# Altium PCB PCB1.PcbDoc (part 1 of 2)
Units mil, origin at the board's own origin, x right, y up, seen from the top; angles counter-clockwise.
Board outline 2362.2 x 2362.2 mil, 2 copper layers (Top Layer, Bottom Layer); 153 components, 106 nets, 570 pads, 334 vias.
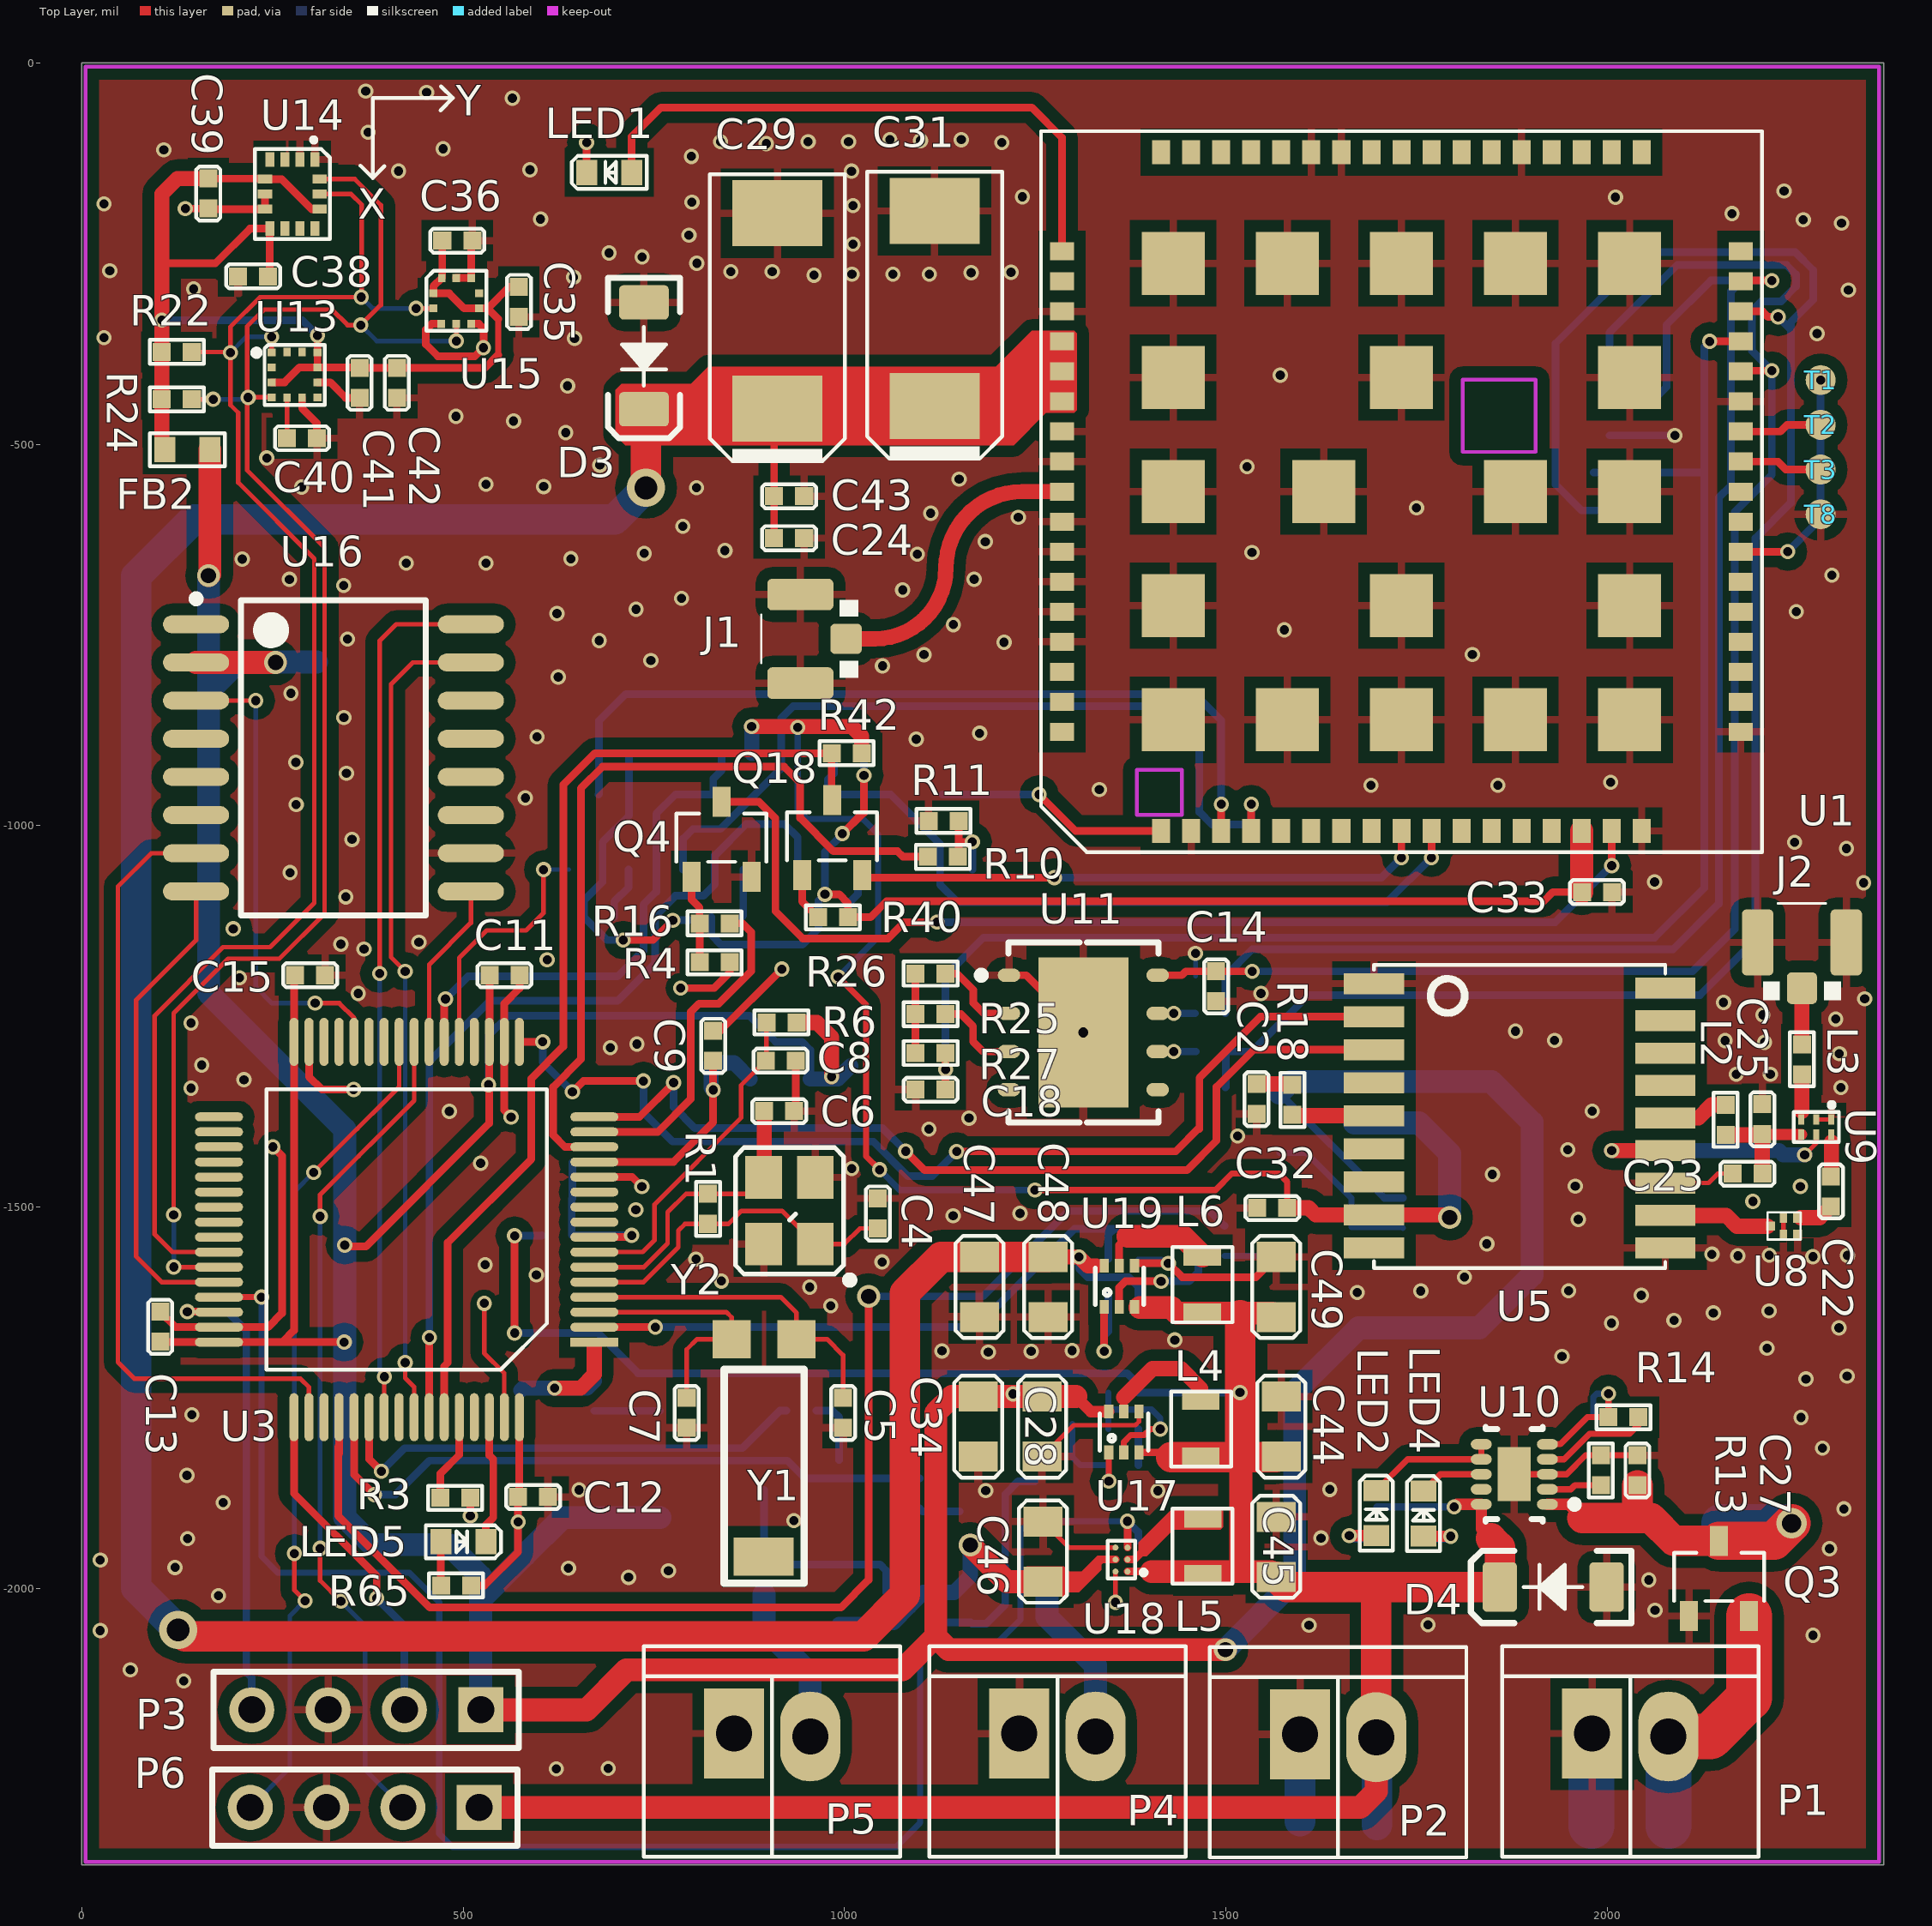
[diagram p0: Top Layer view]
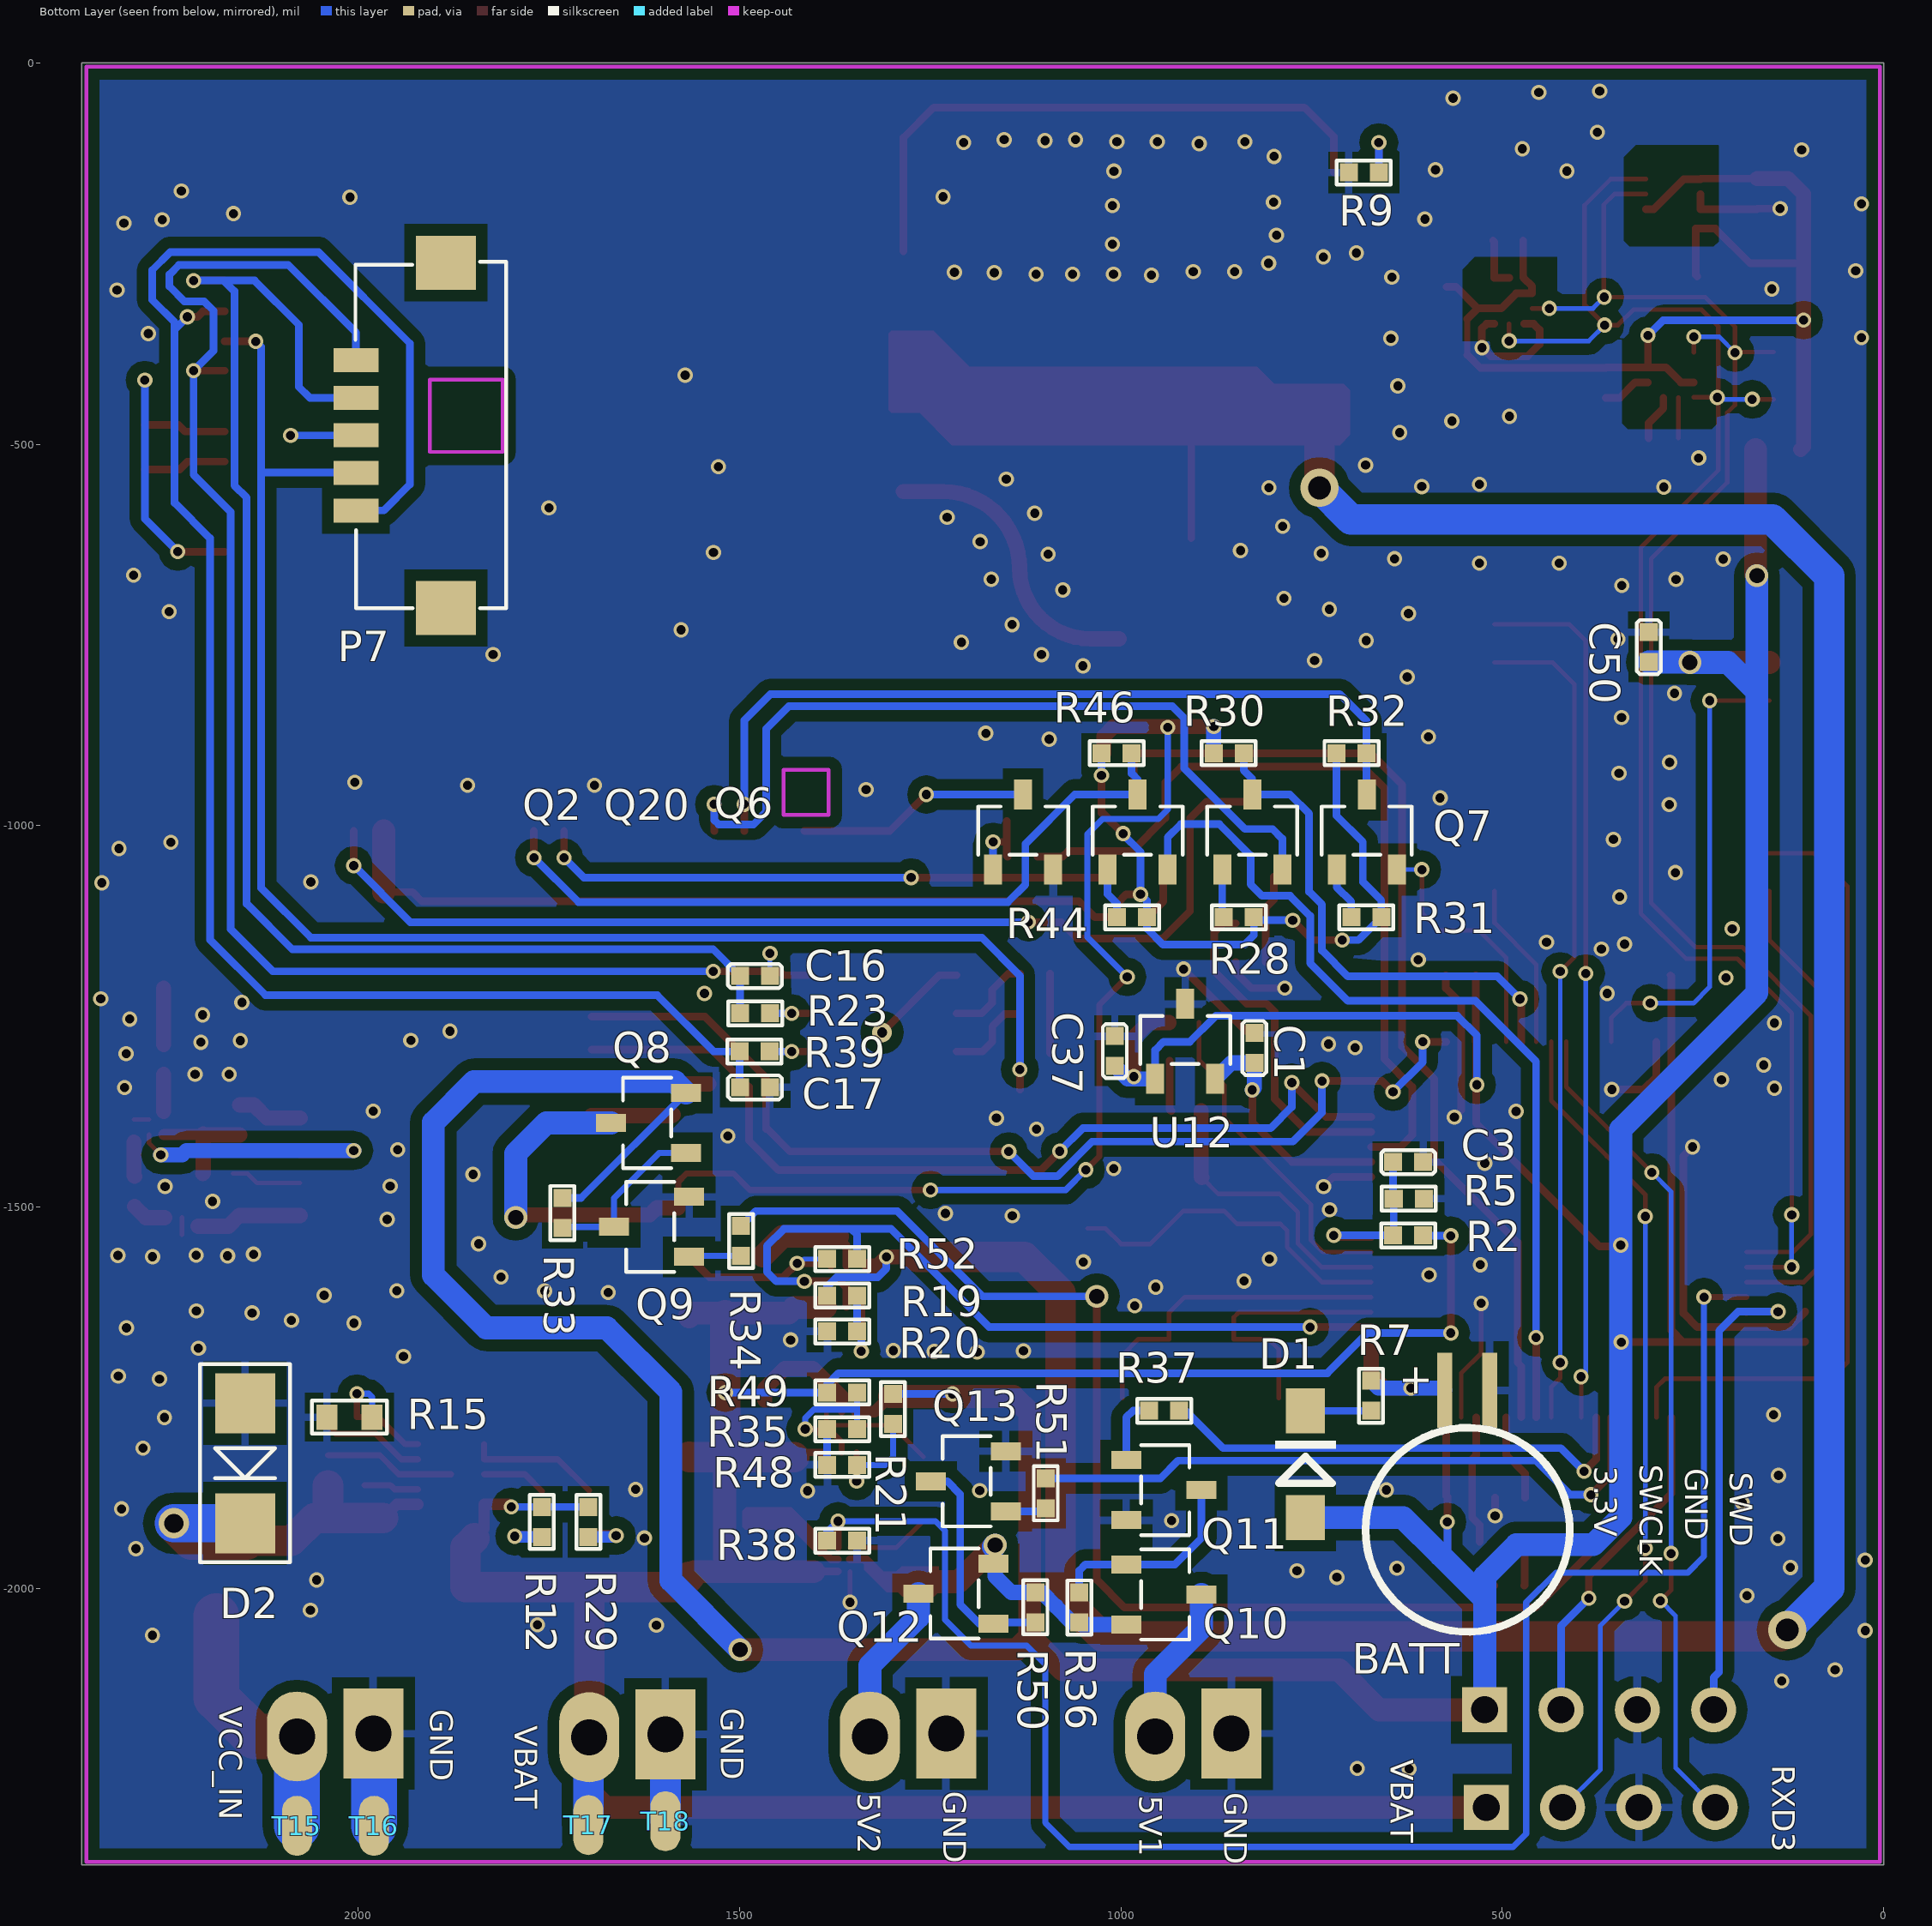
[diagram p1: Bottom Layer view, seen from below]

## Layer stack, top to bottom
Top Layer: signal copper 1.4
Dielectric: dielectric 12.6, FR-4, Dk 4.8
Bottom Layer: signal copper 1.4

## Board outline
0,-2362.2 0,0 2362.2,0 2362.2,-2362.2

## Design rules (kind name [scope] priority, off if disabled: settings)
Clearance [InPolygon  And InNet(AGND)] p1: gap=15
Clearance Clearance_1 [All] p2: gap=5
HoleToHoleClearance [All] p1: gap=5 allowstackedmicrovias=TRUE
MinimumSolderMaskSliver [All] p1: minsoldermaskwidth=1
PolygonConnect PolygonConnect_1 [InNet('AGND') And IsVia] p1: connectstyle=Direct reliefconductorwidth=10 reliefentries=4 polygonreliefangle="90 Angle"
PolygonConnect [All] p2: connectstyle=Relief reliefconductorwidth=10 reliefentries=4 polygonreliefangle="90 Angle"
RoutingVias [All] p1: holewidth=28 width=50 viastyle="Through Hole" minholewidth=28 minwidth=50 maxholewidth=28 maxwidth=50
SilkToSilkClearance [All] p1: silktosilkclearance=5
SilkscreenOverComponentPads [All] p1: minsilkscreentomaskgap=1
SolderMaskExpansion [All] p1: expansion=4
Width [All] p1: maxlimit=200 minlimit=5 preferedwidth=10
24 further rules are at their usual default settings.

## Classes and differential pairs
component class 4G: C2 C23 C32 L2 Q4 R4 R16 R18 U1 U5 U?
component class CPU: BATT C3 C4 C5 C6 C7 C8 C9 C11 C12 C13 C15 C50 D1 LED5 P3 P6 R1 R2 R3 R5 R6 R7 R65 U3 U16 U? Y1 Y2
component class GPS&&lte: C14 C16 C17 C18 C22 C24 C25 C26 C29 C30 C31 C33 C43 D3 J1 J2 L3 LED1 P7 Q2 Q6 Q7 Q18 Q19 Q20 Q21 R8 R9 R10 R11 R23 R25 R26 R27 R28 R30 R31 R32 R39 R40 R41 R42 R43 R44 R45 R46 R47 T1 T2 T3 T8 U8 U9 U11
component class power: C1 C27 C28 C34 C37 C44 C45 C46 C47 C48 C49 D2 D4 L4 L5 L6 LED2 LED4 P1 P2 P4 P5 Q3 Q8 Q9 Q10 Q11 Q12 Q13 R12 R13 R14 R15 R19 R20 R21 R29 R33 R34 R35 R36 R37 R38 R48 R49 R50 R51 R52 T15 T16 T17 T18 U10 U12 U17 U18 U19
component class sensors: C35 C36 C38 C39 C40 C41 C42 FB2 R22 R24 U13 U14 U15

## Components (designator, comment, footprint, x,y, rotation, side; value= is the part's Value field where it differs from the comment)
BATT "MS621FE" MS621FE 546,-1740 r90 bottom
C1 "0.1uF/25V" 0402c 825,-1311 r90 bottom
C2 "4.7uF/10V" 0402c 1540,-1378 r90 top
C3 "0.1uF/25v" 0402c 643,-1441 r180 bottom
C4 "22pF" 0402c 1043.62,-1488.58 r270 top
C5 "6pF" 0402c 998,-1750 r270 top
C6 "22pF" 0402c 934,-1374 r180 top
C7 "6pF" 0402c 793,-1750 r270 top
C8 "0.1uF/25V" 0402C 936,-1308 r180 top
C9 "0.1uF/25V" 0402C 827.76,-1268.82 r270 top
C11 "0.1uF/25V" 0402C 574,-1196 r180 top
C12 "0.1uF/25V" 0402C 611.42,-1879.96 r180 top
C13 "0.1uF/25V" 0402C 103,-1637 r270 top
C14 "0.1uF" 0402C 1487,-1230.25 r90 top
C15 "0.1uF/25V" 0402C 319,-1196 r180 top
C16 "10pF/NC" 0402C 1460,-1197 r0 bottom
C17 "10pF/NC" 0402C 1460,-1343 r0 bottom
C18 "10pF/NC" 0402C 1093.04,-1346 r0 top
C22 "36pF" 0402c 2293,-1499 r90 top
C23 "4.7uF" 0402c 2164,-1456 r0 top
C24 "10pF" 0402C 947,-623 r180 top
C25 "0.1uF" 0402C 2203,-1365 r270 top
C27 "1uF/25V" 0402C 2039.37,-1864.76 r90 top
C28 "22uF/10V" 0805C 1259,-1748.31 r270 top
C29 "1000uF" 7343 912,-453 r90 top
C31 "1000uF" 7343 1118,-450 r90 top
C32 "10uF/10V" 0402C 1541,-1501 r0 top
C33 "0.1uF" 0402C 2006,-1087 r180 top
C34 "22uF/10V" 0805C 1175,-1748.31 r270 top
C35 "0.1uF/25V" 0402C 573,-333 r90 top
C36 "0.1uF/25V" 0402C 512,-233 r180 top
C37 "0.1uF/25V" 0402c 1008,-1315 r90 bottom
C38 "0.1uF/25V" 0402C 205,-280 r0 top
C39 "0.1uF/25V" 0402C 166,-191 r90 top
C40 "22pF" 0402c 269,-492 r0 top
C41 "0.1uF/25V" 0402C 364.25,-439.19 r90 top
C42 "0.1uF/25V" 0402C 413.25,-439.19 r90 top
C43 "33pF" 0402C 947,-568 r180 top
C44 "22uF/10V" 0805C 1572.42,-1827.05 r90 top
C45 "22uF/10V" 0805C 1566,-1984.74 r90 top
C46 "22uF/10V" 0805C 1260,-1991 r90 top
C47 "22uF/10V" 0805C 1177,-1565.26 r270 top
C48 "22uF/10V" 0805C 1267,-1565.26 r270 top
C49 "22uF/10V" 0805C 1566,-1644 r90 top
C50 "0.1uF/25V" 0402C 307.93,-746.08 r270 bottom
D1 "1N4148" DIODE_SOP 758,-1907 r90 bottom
D2 "SMAJ12CA" SMA 2148,-1757 r270 bottom
D3 "DIODE_SCHOTTKY_0" LL-34(D1206) 737,-384 r270 top
D4 "DIODE_SCHOTTKY_0" LL-34(D1206) 1929,-1998 r180 top
FB2 "10R/1A" 0603R 168,-507 r180 top
J1 "IPEX" RF-UFL 942,-755 r90 top
J2 "IPEX" RF-UFL 2255,-1153 r0 top
L2 "27nH" 0402R 2155,-1366 r270 top
L3 "LQW15A" 0402R 2255,-1326 r90 top
L4 "SRP4020TA-1R0M" L2520 1466.99,-1753.05 r270 top
L5 "SRP4020TA-2R2M" L2520 1469.74,-1982 r90 top
L6 "SRP4020TA-1R0M" L2520 1469,-1564 r270 top
LED1 "LED" 0603LED 720.94,-143.75 r180 top
LED2 "LED" 0603LED 1697.2,-1930.51 r90 top
LED4 "LED" 0603LED 1759,-1931.4 r90 top
LED5 "LED" 0603LED 470.67,-1938.58 r0 top
P1 "Header 2" 2X2.54MMZ 1980,-2190 r0 top
P2 "Header 2" 2X2.54MMZ 1597,-2191 r0 top
P3 "Header 4" HDR1X4 523,-2159 r180 top
P4 "Header 2" 2X2.54MMZ 1229,-2190 r0 top
P5 "Header 2" 2X2.54MMZ 855,-2190 r0 top
P6 "Header 4" HDR1X4 521,-2287 r180 top
P7 "Header 5" 5×1.25mmSMT 2002.8,-586.77 r90 bottom
Q2 "MMBT3904" SOT23-3 1167.5,-1057.51 r270 bottom
Q3 "Si2369DS" sot23-3 2107,-2036 r270 top
Q4 "MMBT3904" SOT23-3 799.26,-1067 r270 top
Q6 "MMBT3904" SOT23-3 867.17,-1057.51 r270 bottom
Q7 "MMBT3904" SOT23-3 717,-1057.51 r270 bottom
Q8 "Si2369DS" sot23-3 1570,-1429 r180 bottom
Q9 "S8050" SOT23-3 1566,-1565.26 r180 bottom
Q10 "Si2369DS" sot23-3 992.87,-1968.46 r0 bottom
Q11 "S8050" SOT23-3 992.87,-1831.57 r0 bottom
Q12 "Si2369DS" sot23-3 1167,-2046 r180 bottom
Q13 "S8050" SOT23-3 1150.83,-1898.82 r180 bottom
Q18 "MMBT3904" SOT23-3 944.26,-1065 r270 top
Q20 "MMBT3904" SOT23-3 1017.33,-1057.51 r270 bottom
R1 "1MR" 0402R 821,-1522 r90 top
R2 "10K/1%" 0402R 603.63,-1537 r0 bottom
R3 "100K" 0402R 470,-1881 r0 top
R4 "47K" 0402R 810,-1179 r0 top
R5 "10K/1%" 0402R 642.37,-1489 r180 bottom
R6 "10K" 0402R 937,-1258 r180 top
R7 "470" 0402R 672,-1767 r90 bottom
R9 "1K" 0402R 661.88,-143.75 r0 bottom
R10 "4.7K" 0402R 1148.51,-1040.78 r180 top
R11 "47K" 0402R 1149.51,-993.78 r180 top
R12 "1K/1%" 0402R 1759,-1893 r270 bottom
R13 "3.95K/1%" 0402R 1991.37,-1864.76 r90 top
R14 "21.5k/1%" 0402R 2001.37,-1775.39 r0 top
R15 "RTH103AT" 0603R 2040.74,-1775.39 r180 bottom
R16 "4.7K" 0402R 809.88,-1128 r0 top
R18 "10K" 0402R 1587,-1379 r90 top
R19 "534K/1%" 0402R 1385,-1616 r180 bottom
R20 "100K/1%" 0402R 1385,-1663 r180 bottom
R21 "400K/1%" 0402R 1298.74,-1744.92 r270 bottom
R22 "4.7K" 0402R 105.01,-379 r0 top
R23 "10R" 0402R 1499,-1246 r180 bottom
R24 "4.7K" 0402R 144.38,-441 r180 top
R25 "0R" 0402R 1132.41,-1247 r180 top
R26 "0R" 0402R 1132.41,-1194 r180 top
R27 "10R" 0402R 1132.41,-1298 r180 top
R28 "4.7K" 0402R 865,-1120 r180 bottom
R29 "1K/1%" 0402R 1698,-1893 r270 bottom
R30 "10K" 0402R 839,-905 r0 bottom
R31 "4.7K" 0402R 698,-1120 r180 bottom
R32 "4.7K" 0402R 678,-905 r0 bottom
R33 "4K7" 0402R 1732,-1488 r270 bottom
R34 "4K7" 0402R 1498,-1564 r90 bottom
R35 "10K/1%" 0402R 1385,-1791 r180 bottom
R36 "4K7" 0402R 1054.45,-2044.49 r90 bottom
R37 "4K7" 0402R 962.95,-1766.81 r180 bottom
R38 "10K/1%" 0402R 1345.63,-1937.28 r0 bottom
R39 "10R" 0402R 1500,-1296 r180 bottom
R40 "4.7K" 0402R 965,-1120 r0 top
R42 "10K" 0402R 983,-905 r0 top
R44 "4.7K" 0402R 1005,-1120 r180 bottom
R46 "4.7K" 0402R 986,-905 r0 bottom
R48 "100K/1%" 0402R 1385,-1838 r180 bottom
R49 "13K/1%" 0402R 1385,-1743 r180 bottom
R50 "4K7" 0402R 1112,-2005 r270 bottom
R51 "4K7" 0402R 1098.46,-1894.92 r90 bottom
R52 "10K/1%" 0402R 1385,-1568 r180 bottom
R65 "1K" 0402R 471,-1996 r0 top
T1 "TPD" TPD 2279.53,-415.82 r0 top
T2 "TPD" TPD 2279.53,-474.49 r0 top
T3 "TPD" TPD 2279.53,-533.15 r0 top
T8 "TPD" TPD 2279.53,-591.82 r0 top
T15 "TPD" TP#1 2080,-2311 r90 top
T16 "TPD" TP#1 1979,-2311 r90 top
T17 "TPD" TP#2 1698,-2310 r270 bottom
T18 "TPD" TP#2 1597,-2305 r270 bottom
U1 "A7670" A7670 1730,-562 r90 top
U3 "stm32l412r8t6" LQFP-64 672,-1677 r180 top
U5 "SIM868E/SIM68" SIM68MB 1694,-1207 r0 top
U8 "SAFFB1G56KB0F0A" SAFFB1G56KB0F0A 2214,-1525 r0 top
U9 "AW5005DNR" AW5005 2274,-1395 r270 top
U10 "bq24210" QFN50P200X300X80-10N 1878,-1850.19 r180 top
U11 "SLI76CF3600P" QFN127P500X600X80-8N 1313,-1271 r0 top
U12 "REF3025AIDBZR" SOT23-3 955,-1332 r270 bottom
U13 "LIS2MDL" LIS2MDL 279,-409 r0 top
U14 "LSM6DS3TR" LSM6DS3TR-C 276,-172 r270 top
U15 "BMP388" BMP388 491,-312 r90 top
U16 "MX25L51245GMI-10G" SOP127P1030X239-16N 330,-911 r0 top
U17 "TPS61023" SOT563-6 1366,-1795 r0 top
U18 "TPS610997YFFR" TPS610997YFFR 1363,-1962 r180 top
U19 "TPS61023" SOT563-6 1360,-1604 r0 top
Y1 "MC-146 32.768K/6pF" 32.768K 852,-1673 r0 top
Y2 "8MHz" OSCILLATOR-3.2X2.5 928,-1505 r90 top

## Footprints (in the part's own frame and the unit in brackets; to place one, negate y for a bottom-side part, rotate by r counter-clockwise, add the part's x,y. Pads: shape width x height; smd on the part's side, far side on the other; paste and mask are expansions set on the pad)
2X2.54MMZ [mm]
  rect 2x3 hole 1.2: 1(0,0)
  oval 2x3 hole 1.2: 2(2.54,-0.1)
  silkscreen extent -3,-4.1 5.54,2.9
5×1.25mmSMT [mm]
  rect 1.8x2 smd: 0(-3.25,-3) 0(8.25,-3)
  rect 0.8x1.5 smd: 1(0,0) 2(1.25,0) 3(2.5,0) 4(3.75,0) 5(5,0)
  round 0.5 on Bottom Overlay: ""(-0.875,0.432)
  silkscreen extent -3.25,-5 8.28,0.02
32.768K [mil]
  rect 50x50 smd: 1(0,0) 2(85,0)
  rect 78.74x50 smd: 3(42.13,-285)
  silkscreen extent -10,-320 95,-40
0402c [mm]
  rect 0.6x0.6 smd: 1(0,0) 2(1,0)
  silkscreen extent -0.4,-0.4 1.4,0.4
0402C [mm]
  rect 0.6x0.6 smd: 1(0,0) 2(1,0)
  silkscreen extent -0.4,-0.4 1.4,0.4
0402R [mm]
  rect 0.6x0.6 smd: 1(0,0) 2(1,0)
  silkscreen extent -0.4,-0.4 1.4,0.4
0603LED [mm]
  rect 0.7x0.85 smd: 1(0,0) 2(1.5,0)
  silkscreen extent -0.5,-0.55 2,0.55
0603R [mm]
  rect 0.7x0.85 smd: 1(0,0) 2(1.5,0)
  silkscreen extent -0.5,-0.55 2,0.55
0805C [mm]
  rect 1x1.3 smd: 1(0,0) 2(2,0)
  silkscreen extent -0.7,-0.8 2.7,0.8
7343 [mm]
  rect 2.2x3 smd: 1(0,0) 2(6.5,0)
  silkscreen extent -1.75,-2.25 7.8,2.25
A7670 [mm]
  rect 0.8x0.6 smd: 1(-11.3,8) 2(-11.3,7) 3(-11.3,6) 4(-11.3,5) 5(-11.3,4) 6(-11.3,3) 7(-11.3,2) 8(-11.3,1) 9(-11.3,0) 10(-11.3,-1) 11(-11.3,-2) 12(-11.3,-3) 13(-11.3,-4) 14(-11.3,-5) 15(-11.3,-6) 16(-11.3,-7) 17(-11.3,-8) 35(11.3,-8) 36(11.3,-7) 37(11.3,-6) 38(11.3,-5) 39(11.3,-4) 40(11.3,-3) 41(11.3,-2) 42(11.3,-1) 43(11.3,0) 44(11.3,1) 45(11.3,2) 46(11.3,3) 47(11.3,4) 48(11.3,5) 49(11.303,6) 50(11.3,7) 51(11.3,8)
  rect 0.6x0.8 smd: 18(-8,-11.3) 19(-7,-11.3) 20(-6,-11.3) 21(-5,-11.3) 22(-4,-11.3) 23(-3,-11.3) 24(-2,-11.3) 25(-1,-11.3) 26(0,-11.3) 27(1,-11.3) 28(2,-11.3) 29(3,-11.3) 30(4,-11.3) 31(5,-11.3) 32(6,-11.3) 33(7,-11.3) 34(8,-11.3) 52(8,11.3) 53(7,11.3) 54(6,11.3) 55(5,11.3) 56(4,11.3) 57(3,11.3) 58(2,11.3) 59(1,11.3) 60(0,11.3) 61(-1,11.3) 62(-2,11.3) 63(-3,11.3) 64(-4,11.3) 65(-5,11.3) 66(-6,11.3) 67(-7,11.3) 68(-8,11.3)
  rect 2.1x2.1 smd: 69(-7.6,7.6) 70(-7.6,3.8) 71(-7.6,0) 72(-7.6,-3.8) 73(-7.6,-7.6) 74(-3.8,-7.6) 75(0,-7.6) 76(3.8,-7.6) 77(7.6,-7.6) 78(7.6,-3.8) 79(7.6,0) 80(7.6,3.8) 81(7.6,7.6) 82(3.8,7.6) 83(0,7.6) 84(-3.8,7.6) 85(-3.8,0) 86(0,-3.8) 87(3.8,0) 88(0,2.591)
  Keep-Out Layer lines w0.127: 1.321,-2.045 3.721,-2.045 ; 1.321,-2.07 1.321,-4.47 3.721,-4.47 3.721,-2.07 ; -10.77,8.814 -9.27,8.814 -9.27,7.314 -10.77,7.314 -10.77,8.814
  silkscreen extent -12,-12 12,12
AW5005 [mm]
  rect 0.35x0.2 smd: 1(-0.25,0.5) 2(-0.25,0) 3(-0.25,-0.5) 4(0.25,-0.5) 5(0.25,0) 6(0.25,0.5)
  silkscreen extent -0.77,-0.75 0.5,0.75
BMP388 [mm]
  rect 0.25x0.275 smd: 1(0.25,0.763) 2(-0.25,0.763) 6(-0.25,-0.763) 7(0.25,-0.763)
  rect 0.275x0.25 smd: 3(-0.763,0.5) 4(-0.763,0) 5(-0.763,-0.5) 8(0.763,-0.5) 9(0.763,0) 10(0.763,0.483)
  silkscreen extent -1,-1 1,1
DIODE_SOP [mm]
  rect 1.5x1.3 smd: 1(0,0) 2(3.556,0)
  silkscreen extent 1.14,-1.02 2.56,1.02
HDR1X4 [mm] "Connector; Header; 4 Position"
  rect 1.5x1.5 hole 0.9: 1(0,0)
  round 1.5 hole 0.9: 2(2.54,0) 3(5.08,0) 4(7.62,0)
  silkscreen extent -1.27,-1.27 8.89,1.27
L2520 [mm]
  rect 0.65x1.25 smd: 1(0,0) 2(1.9,0)
  silkscreen extent -0.29,-0.99 2.21,1.01
LIS2MDL [mm]
  rect 0.275x0.25 smd: 1(-0.763,0.75) 2(-0.763,0.25) 3(-0.763,-0.25) 4(-0.763,-0.75) 7(0.763,-0.75) 8(0.763,-0.25) 9(0.763,0.25) 10(0.763,0.75)
  rect 0.25x0.275 smd: 5(-0.25,-0.763) 6(0.25,-0.763) 11(0.25,0.763) 12(-0.25,0.763)
  silkscreen extent -1.35,-1 1,1
LL-34(D1206) [mil]
  rrect25% 45x65 smd: 1(-70,0) 2(70,0)
  silkscreen extent -102,-47 108,47, body extent -70,-28 68,30, height 56
LQFP-64 [mm]
  rect 1.6x0.3 smd: 1(0,0)
  oval 1.6x0.3 smd: 2(0,-0.5) 3(0,-1) 4(0,-1.5) 5(0,-2) 6(0,-2.5) 7(0,-3) 8(0,-3.5) 9(0,-4) 10(0,-4.5) 11(0,-5) 12(0,-5.5) 13(0,-6) 14(0,-6.5) 15(0,-7) 16(0,-7.5) 33(12.5,-7.5) 34(12.5,-7) 35(12.5,-6.5) 36(12.5,-6) 37(12.5,-5.5) 38(12.5,-5) 39(12.5,-4.5) 40(12.5,-4) 41(12.5,-3.5) 42(12.5,-3) 43(12.5,-2.5) 44(12.5,-2) 45(12.5,-1.5) 46(12.5,-1) 47(12.5,-0.5) 48(12.5,0)
  oval 0.3x1.6 smd: 17(2.5,-10) 18(3,-10) 19(3.5,-10) 20(4,-10) 21(4.5,-10) 22(5,-10) 23(5.5,-10) 24(6,-10) 25(6.5,-10) 26(7,-10) 27(7.5,-10) 28(8,-10) 29(8.5,-10) 30(9,-10) 31(9.5,-10) 32(10,-10) 49(10,2.5) 50(9.5,2.5) 51(9,2.5) 52(8.5,2.5) 53(8,2.5) 54(7.5,2.5) 55(7,2.5) 56(6.5,2.5) 57(6,2.5) 58(5.5,2.5) 59(5,2.5) 60(4.5,2.5) 61(4,2.5) 62(3.5,2.5) 63(3,2.5) 64(2.5,2.5)
  silkscreen extent 1.59,-8.41 10.91,0.91
LSM6DS3TR-C [mm]
  rect 0.48x0.3 smd: 1(-1.15,0.75) 2(-1.15,0.25) 3(-1.15,-0.25) 4(-1.15,-0.75) 8(1.15,-0.75) 9(1.15,-0.25) 10(1.15,0.25) 11(1.15,0.75)
  rect 0.3x0.48 smd: 5(-0.5,-0.91) 6(0,-0.91) 7(0.5,-0.91) 12(0.5,0.91) 13(0,0.91) 14(-0.5,0.91)
  silkscreen extent -1.83,-1.25 1.5,1.25
MS621FE [mm]
  rect 2.5x0.5 smd: 1(0,-0.749) 2(0,0.749)
  silkscreen extent -8.05,-3.41 -1.25,3.39
OSCILLATOR-3.2X2.5 [mil] "OSCILLATOR-3.2X2.5"
  rect 56x48 smd: 1(-43.31,-33.46) 2(44,-33.46) 3(44,34) 4(-43.31,34)
  silkscreen extent -95,-83 83,71
QFN50P200X300X80-10N [mm] "QFN, 10-Leads, Body 2.9x1.9mm (max), Pitch 0.50mm, IPC Medium Density"
  oval 0.7x0.35 smd: 1(-1.1,1) 2(-1.1,0.5) 3(-1.1,0) 4(-1.1,-0.5) 5(-1.1,-1) 6(1.1,-1) 7(1.1,-0.5) 8(1.1,0) 9(1.1,0.5) 10(1.1,1)
  rect 1.1x1.8 smd: 11(0,0)
  silkscreen extent -2.13,-1.58 0.95,1.57, body extent -0.95,-1.45 0.95,1.45, height 0.8
QFN127P500X600X80-8N [mm] "QFN, 8-Leads, Body 6.0x5.0mm (max), Pitch 1.27mm, IPC Medium Density"
  oval 0.75x0.45 smd: 1(-2.475,1.905) 2(-2.475,0.635) 3(-2.475,-0.635) 4(-2.475,-1.905) 5(2.475,-1.905) 6(2.475,-0.635) 7(2.475,0.635) 8(2.475,1.905)
  rect 3x5 smd: 9(0,0)
  silkscreen extent -3.52,-3 2.5,3
RF-UFL [mm]
  rrect30% 1x1.05 smd: 1(0,-1.525)
  rrect30% 1.05x2.2 smd: 2(-1.475,0) 2(1.475,0)
  silkscreen extent -1.3,-1.93 1.3,1.3, body extent -1.7,-1.55 1.7,1.55, height 1.25
SAFFB1G56KB0F0A [mm]
  rect 0.3x0.3 smd: 1(0,0)
  rect 0.25x0.35 smd: 2(0.425,-0.288) 5(0.425,0.288)
  rect 0.3x0.35 smd: 3(0.9,-0.288) 4(0.9,0.288)
  silkscreen extent -0.1,-0.44 1,0.46
SIM68MB [mm]
  rect 2x0.7 smd: 1(0,0) 2(0,-1.1) 3(0,-2.2) 4(0,-3.3) 5(0,-4.4) 6(0,-5.5) 7(0,-6.6) 8(0,-7.7) 9(0,-8.8) 10(9.7,-8.8) 11(9.7,-7.719) 12(9.7,-6.638) 13(9.7,-5.557) 14(9.7,-4.476) 15(9.7,-3.395) 16(9.7,-2.314) 17(9.7,-1.233) 18(9.7,-0.152)
  silkscreen extent 0,-9.47 9.7,0.63
SMA [mm]
  rect 2x2 smd: 1(0,0) 2(4,0)
  silkscreen extent -1.3,-1.5 5.3,1.5
SOP127P1030X239-16N [mm] "SOP, 16-Leads, Body 10.5x7.6mm (max), Pitch 1.27mm, IPC Medium Density"
  oval 2.2x0.6 smd: 1(-4.575,4.445) 2(-4.575,3.175) 3(-4.575,1.905) 4(-4.575,0.635) 5(-4.575,-0.635) 6(-4.575,-1.905) 7(-4.575,-3.175) 8(-4.575,-4.445) 9(4.575,-4.445) 10(4.575,-3.175) 11(4.575,-1.905) 12(4.575,-0.635) 13(4.575,0.635) 14(4.575,1.905) 15(4.575,3.175) 16(4.575,4.445)
  silkscreen extent -4.7,-5.25 3.08,5.42, body extent -3.8,-5.25 3.8,5.25, height 2.39
SOT23-3 [mm]
  rect 1x0.6 smd: 1(0,0) 2(0,2) 3(-2.5,1)
  silkscreen extent -2.1,-0.5 -0.5,2.5
sot23-3 [mm]
  rect 1x0.6 smd: 1(0,0) 2(0,2) 3(-2.5,1)
  silkscreen extent -2.1,-0.5 -0.5,2.5
SOT563-6 [mil] "SOT563-6"
  rect 12x18 smd: 1(-19.68,-26.57) 2(0,-26.57) 3(20,-26.57) 4(20,27) 5(0,27) 6(-19.68,27)
  silkscreen extent -31,-24 32,24
TP#1 [mm]
  oval 2x1 smd far side: 1(0,0)
TP#2 [mm]
  oval 2x1 smd: 1(0,0)
TPD [mm]
  round 1 smd: 1(0,0)
TPS610997YFFR [mm]
  round 0.2 smd: A1(-0.2,0.4) A2(0.2,0.4) B1(-0.2,0) B2(0.2,0) C1(-0.2,-0.4) C2(0.2,-0.4)
  silkscreen extent -0.77,-0.63 0.46,0.63

## Part data
BATT: library part SBatery
C1 C2 C22 C23 C37: library part Cap, "Capacitor"
C3 C4 C5 C6 C7 C8 C9 C11 C12 C13 C14 C15 C16 C17 C18 C24 C25 C27 C28 C32 C33 C34 C35 C36 C38 C39 C40 C41 C42 C43 C44 C45 C46 C47 C48 C49 C50: library part CAP, "Capacitor"
C29 C31: library part "Cap Pol3", "Polarized Capacitor (Surface Mount)"
D1: library part D
D2: library part DIODE_SCHOTTKY_0
FB2: library part INDUCTOR1
J1 J2: library part ANT
L2 L3 L4 L5 L6: library part INDUCTOR_1
P1 P2 P4 P5: "Header, 2-Pin"
P3 P6: "Header, 4-Pin"
P7: "Header, 5-Pin"
Q2 Q4 Q9 Q11 Q13: library part 2N1069_1
Q3 Q8 Q10 Q12: library part NCE4060K, "NMOSFET"
Q6 Q7 Q18 Q20: library part NPN
R1: library part Res3, "Resistor"
R2 R4 R5 R9 R10 R11 R12 R13 R14 R15 R16 R18 R19 R20 R21 R22 R23 R24 R25 R26 R27 R28 R29 R30 R31 R32 R33 R34 R35 R36 R37 R38 R39 R40 R42 R44 R46 R48 R49 R50 R51 R52 R65: library part RES1
R3 R6 R7: library part Res2, "Resistor"
U3: library part STM32L100R8T6, "ARM Cortex-M3 32-bit MCU, 64 KB Flash, 8 KB Internal RAM, 51 I/Os, 64-pin LQFP, -40 to 85 degC, Tray"
U5: library part SIM68MB
U8: library part SAFFB1G56KBOFA
U10: library part bq2410
U12: library part REF3012
Y1 Y2: library part XTAL, "Crystal Oscillator"

## Via types
v1: diameter 20, hole 12, Top Layer to Bottom Layer, tented both sides, 324 vias
v2: diameter 30, hole 20, Top Layer to Bottom Layer, tented both sides, 6 vias
v3: diameter 50, hole 30, Top Layer to Bottom Layer, tented both sides, 2 vias
v4: diameter 25.98, hole 12.99, Top Layer to Bottom Layer, tented top, 1 vias
v5: diameter 40, hole 25, Top Layer to Bottom Layer, tented both sides, 1 vias

## Nets (pads, with @x,y where several pads share a name; then routed paths per layer and width w, separated by ;. In a path a pad name is that pad's centre, name@x,y a point inside that pad or via, vN(x,y) a via of type N, cw(c..) or ccw(c..) an arc to the next point about the centre after c; other vN are vias at no path point)
2.5V: C1.1 C9.2 U3.13 U12.2 | length 354.3
  Top Layer w10: U3.13@672,-1440.78 775.72,-1440.78 827.76,-1388.74 v1(827.76,-1346.34) C9.2@827.76,-1308.19
  Bottom Layer w20: v1(827.76,-1346.34) 825,-1343.58 C1.1@825,-1311 855.26,-1311 U12.2@876.26,-1332
AGND: BATT.1 C1.2 C2.1 C3.2 C4.1 C5.2 C6.1 C7.2 C8.1 C9.1 C11.1 C12.1 C13.1 C14.1 C15.1 C16.1 C17.1 C18.1 C23.1 C24.1 C25.1 C27.2 C28.2 C29.2 C31.2 C32.1 C33.1 C34.2 C35.1 C36.1 C37.2 C38.1 C39.1 C40.2 C41.1 C42.1 C43.1 C44.2 C45.2 C46.2 C47.2 C48.2 C49.2 C50.1 D2.1 D3.1 D4.1 J1.2 J2.2 P1.1 P2.1 P3.3 P4.1 P5.1 P6.3 P7.3 Q2.2 Q3.1 Q4.2 Q9.2 Q11.2 Q13.2 R3.2 R4.2 R5.2 R9.2 R11.2 R13.2 R15.1 R20.1 R35.1 R38.1 R48.1 R52.1 T8.1 T16.1 T18.1 U1.2 U1.17 U1.18 U1.29 U1.39 U1.45 U1.46 U1.54 U1.58 U1.59 U1.61 U1.62 U1.63 U1.64 U1.65 U1.69 U1.70 U1.71 U1.72 U1.73 U1.74 U1.75 U1.76 U1.77 U1.78 U1.79 U1.80 U1.81 U1.82 U1.83 U1.84 U1.85 U1.86 U1.87 U1.88 U3.12 U3.18 U3.31 U3.47 U3.63 U5.1 U5.10 U5.12 U8.2 U8.3 U8.5 U9.1 U9.2 U10.3 U10.11 U11.1 U11.9 U12.3 U13.6 U13.8 U14.1 U14.2 U14.3 U14.6 U14.7 U15.3 U15.5 U15.8 U15.9 U16.10 U17.4 U18.A2 U18.C2 U19.4 Y2.2 Y2.4 | length 3119.1
  Top Layer w6: v1(527.64,-1626.1) 527.64,-1691.38 553.89,-1717.63 U3.63@553.89,-1775.43 ; C28.2@1259,-1827.05 1300.18,-1785.87 1381.22,-1785.87 1386,-1781.09 U17.4@1386,-1768 ; C46.2@1260,-1912.26 1293.99,-1946.25 U18.C2@1355.13,-1946.25 ; v1(1355.13,-2018.02) U18.A2@1355.13,-1977.75 ; U5.12@2075.89,-1468.34 2132.48,-1468.34 2144.83,-1456 C23.1@2164,-1456 ; U8.2@2230.73,-1536.32 U8.5@2230.73,-1513.68 ; U9.2@2274,-1385.16 U9.1@2293.69,-1385.16
  Top Layer w8: U10.11@1878,-1850.19 U10.3@1921.31,-1850.19 1946.66,-1850.19 1971.46,-1825.39 R13.2@1991.37,-1825.39 C27.2@2039.37,-1825.39
  Top Layer w10: C13.1@103,-1637 123.32,-1657.32 U3.47@179.87,-1657.32 244.22,-1657.32 262.52,-1639.02 262.52,-1432.83 v1(250.71,-1421.02) ; v1(135.81,-191) C39.1@166,-191 166.68,-191.68 U14.7@240.17,-191.68 U14.6@240.17,-172 ; U13.6@288.84,-439.02 288.84,-452.86 308.37,-472.39 C40.2@308.37,-492 ; U3.31@297.98,-1283.3 297.98,-1328.96 314.72,-1345.7 v1@357.91,-1345.7 ; U13.8@309.02,-418.84 325.73,-418.84 346.08,-439.19 C41.1@364.25,-439.19 ; U15.3@471.32,-342.02 459.04,-342.02 451.14,-349.92 451.14,-368.94 466.85,-384.65 515.39,-384.65 v1(526.54,-373.5) 526.93,-373.11 526.93,-348.35 520.6,-342.02 U15.5@510.68,-342.02 ; U15.9@491,-281.98 U15.8@510.68,-281.98 510.68,-234.32 C36.1@512,-233 ; v1(509.37,-1904.69) R3.2@509.37,-1881 ; v1(562.91,-1381.97) 553.89,-1372.94 U3.18@553.89,-1283.3 553.89,-1233.28 574,-1213.17 C11.1@574,-1196 ; U3.12@672,-1460.46 721.45,-1460.46 v1(734.17,-1473.19) ; v1(785.24,-1212.91) 829.09,-1212.91 849.37,-1192.64 R4.2@849.37,-1179 ; C9.1@827.76,-1268.82 836.93,-1268.82 v1(917.76,-1187.99) ; C6.1@934,-1374 936,-1372 C8.1@936,-1308 ; U11.1@1215.56,-1196 1238,-1196 U11.9@1313,-1271 ; U19.4@1380,-1577 1383.39,-1573.61 v1(1424.37,-1573.61) 1442.55,-1591.8 1539.46,-1591.8 C49.2@1566,-1565.26
  Bottom Layer w6: R52.1@1385,-1568 1415.37,-1568 v1@1424.37,-1577 ; C16.1@1460,-1197 v1(1460,-1167.44)
  Bottom Layer w10: R48.1@1385,-1838 R35.1@1385,-1791 ; P7.3@2002.8,-488.35 v1(2088.43,-488.35)
  Bottom Layer w40: T18.1@1597,-2305 P2.1@1597,-2191
  Bottom Layer w60: T16.1@1979,-2311 1979,-2191 P1.1@1980,-2190
  other v1: 622.24,-2236.42 690.12,-2235.91 133.66,-2121.22 63.78,-2106.54 2269.57,-2061.3 24.25,-2055.2 1608.74,-2048.03 1764.88,-2047.6 2062.36,-2028.5 179.25,-2009.41 2054.17,-1988.7 716.93,-1985.28 769.09,-1976.77 637.99,-1973.23 122.32,-1972.32 24.25,-1962.68 2291.26,-1947.76 138.78,-1934.45 1624.57,-1933.82 933.54,-1910.83 2309.96,-1895.63 185.32,-1887.44 1410.71,-1871.97 651.93,-1870.75 1185.04,-1871.5 1636.1,-1870.08 137.83,-1851.61 2281.89,-1816.02 2253.7,-1775.83 144.33,-1772.05 2260.24,-1725.32 2314.25,-1721.54 1940.35,-1695.71 1188.35,-1690.04 1127.76,-1688.54 1244.53,-1689.06 1298.19,-1688.07 2209.21,-1685.04 1432.83,-1674.13 2303.54,-1658.35 2005.35,-1652.09 2087.24,-1648.54 2138.86,-1638.74 2211.85,-1636.06 981.85,-1629.45 2044.49,-1615.59 1672.05,-1611.81 1755.39,-1610 1949.06,-1609.68 954.33,-1604.8 838.58,-1596.93 1812.64,-1591.65 595.91,-1588.82 528.86,-1575.51 1049.17,-1571.85 805.2,-1568.03 2269.41,-1565.04 2171.02,-1563.86 2212.17,-1562.95 2314.72,-1563.27 2137.01,-1561.77 1841.97,-1548.15 1961.81,-1516.06 1142.36,-1511.26 1230.04,-1508.31 726.42,-1503.35 2190.67,-1492.56 2252.99,-1472.91 1957.87,-1472.44 1849.29,-1457.01 1009.45,-1449.57 522.87,-1442.52 1948.11,-1424.72 1515.28,-1406.77 1110.47,-1397.76 1163.15,-1383.31 481.89,-1374.37 1980.04,-1374.13 356.46,-1345.7 143.23,-1344.09 2306.06,-1343.19 212.64,-1332.99 2168.94,-1325.91 2213.66,-1325.91 157.28,-1313.7 2303.98,-1298.78 692.99,-1291.06 727.8,-1286.26 2205.91,-1283.86 2154.29,-1281.77 1930.75,-1281.38 1879.49,-1269.41 143.23,-1258.66 2299.21,-1253.46 2203.82,-1248.07 2152.2,-1231.69 2337.2,-1227.01 362.48,-1219.96 1545.87,-1219.84 206.65,-1199.45 610.16,-1175.79 370.04,-1161.65 339.61,-1155.24 441.97,-1152.72 346.22,-1093.27 2335.94,-1074.84 2061.89,-1073.74 273.07,-1061.54 2313.46,-1029.88 2245.31,-1021.65 354.25,-1017.99 281.1,-972.28 581.5,-963.5 1333.98,-952.72 1690.08,-946.97 1856.42,-946.97 2004.17,-943.11 347.09,-931.26 280.67,-916.89 1093.9,-886.57 596.89,-883.5 1177.01,-878.86 343.7,-858.11 274.33,-826.38 624.57,-805 1049.68,-790.39 746.14,-783.46 1104.06,-775.71 1823.03,-775.47 1209.06,-759.61 678.43,-757.32 348.35,-755.32 1576.42,-743.35 1142.68,-736.38 623.03,-721.93 2247.6,-719.41 726.73,-716.18 786.14,-701.89 1076.14,-690.94 343.27,-685.12 272.2,-677.09 1169.88,-676.97 2294.33,-671.54 425.47,-655.91 530.04,-655.91 210.47,-650.43 641.14,-650.12 1095.47,-644.06 737.36,-643.11 1534.02,-641.89 843.19,-639.33 1184.57,-627.6 787.99,-607.52 1227.83,-595.79 1112.99,-590.39 1749.8,-583.43 806.02,-556.89 288.27,-556.1 605.55,-555.39 529.84,-552.4 1150.2,-545.71 1527.6,-529.49 679.21,-527.32 242.6,-518.03 634.61,-484.72 566.1,-469.57 490.71,-463.39 636.89,-423.39 1571.26,-409.37 645.98,-361.18 29.06,-360.28 2274.96,-354.8 2315.94,-297.83 146.61,-296.34 644.76,-280.87 960,-278.27 1009.72,-276.97 1063.31,-276.97 1111.1,-276.97 1165.98,-275.04 850.87,-273.74 905.12,-273.74 1218.27,-274.41 36.73,-272.6 806.34,-262.76 734.65,-254.37 691.38,-249.21 1011.02,-237.6 795.98,-225.94 2306.85,-210.12 2256.73,-205.55 601.5,-204.88 2163.31,-197.6 1011.02,-187.2 29.06,-184.88 799.88,-182.72 1233.11,-175.59 2010.59,-176.22 2231.65,-167.95 415.28,-141.77 1009.06,-142.01 587.64,-140.24 799.21,-122.64 107.52,-114.09 473.78,-112.56 897.36,-105.87 1206.02,-104.57 837.32,-103.27 952.24,-103.27 1005.2,-103.27 1099.49,-102.01 1059.45,-100.71 1153.07,-100.71 375.28,-90.98 564.57,-46.38 452.2,-38.7 372.2,-37.13
CS: U3.50 U16.7 | length 1047.6
  Top Layer w6: U16.7@149.88,-1036 91.09,-1036 47.44,-1079.65 47.44,-1703.19 69.21,-1724.96 286.85,-1724.96 297.98,-1736.09 U3.50@297.98,-1775.43
DM: T2.1 U1.28 | length 108.3
  Top Layer w10: U1.28@2174.88,-483.26 2226.86,-483.26 2235.63,-474.49 T2.1@2279.53,-474.49
DP: T3.1 U1.27 | length 109
  Top Layer w10: U1.27@2174.88,-522.63 2223.54,-522.63 2234.06,-533.15 T3.1@2279.53,-533.15
DTR: Q7.3 R32.1 U1.3 | length 1086.3
  Top Layer w10: U1.3@1493.78,-1006.88 v1(1493.78,-971.87)
  Bottom Layer w10: Q7.3@677.63,-959.09 678,-958.72 R32.1@678,-905 678,-862.55 713.19,-827.36 1459.25,-827.36 1493.78,-861.89 v1(1493.78,-971.87)
EN_3V8: R52.2 U3.2 U19.2 | length 1068.8
  Top Layer w10: U3.2@672,-1657.32 v1(752.08,-1657.32) ; U19.2@1360,-1630.57 1360,-1605.37 1368.17,-1597.2 v1(1415,-1597.2)
  Bottom Layer w10: v1(752.08,-1657.32) 1172.57,-1657.32 1301.26,-1528.62 1353.15,-1528.62 ; R52.2@1345.63,-1568 1345.63,-1536.14 1353.15,-1528.62 ; v1(1415,-1597.2) 1451.72,-1597.2 1464.02,-1584.91 1464.02,-1550.87 1441.77,-1528.62 1353.15,-1528.62
EN_5V: R38.2 U3.45 U18.C1 | length 2299.4
  Top Layer w8: U3.45@179.87,-1617.94 v1(235.56,-1617.94)
  Top Layer w10: U18.C1@1370.87,-1946.25 v1(1370.87,-1911.8)
  Bottom Layer w8: v1(235.56,-1617.94) 235.56,-1958 256.69,-1979.13 429.61,-1979.13 468.66,-2018.19 468.66,-2321.61 485.67,-2338.62 1067.68,-2338.62 1099.17,-2307.13 1099.17,-2099.13 1123.5,-2074.8 1196.57,-2074.8 1230.51,-2040.87 1230.51,-1924.06 1242.76,-1911.8 v1(1370.87,-1911.8) ; v1@235.56,-1617.8 v1@235.71,-1617.8
  Bottom Layer w10: v1(1370.87,-1911.8) 1385,-1925.93 R38.2@1385,-1937.28
EN_5V1: R37.2 U3.54 | length 641.1
  Top Layer w10: U3.54@376.72,-1775.43 376.72,-1830.15 v1(392.81,-1846.23)
  Bottom Layer w10: v1(392.81,-1846.23) 423.14,-1815.91 865.87,-1815.91 914.96,-1766.81 R37.2@923.58,-1766.81
EN_5V2: R51.2 U3.53 | length 855.7
  Top Layer w10: U3.53@357.04,-1775.43 357.04,-1850.31 v1(383.82,-1877.09)
  Bottom Layer w10: v1(383.82,-1877.09) 410.98,-1877.09 455.87,-1832.2 714.36,-1832.2 924.88,-1832.2 948.23,-1855.55 R51.2@1098.46,-1855.55
LNA_EN: U5.13 U9.5 | length 358.6
  Top Layer w6: v1(2258.62,-1431.46) 2274,-1416.08 U9.5@2274,-1404.84
  Top Layer w20: v1(2005.63,-1425.79) U5.13@2075.89,-1425.79
  Bottom Layer w20: v1(2005.63,-1425.79) 2224.96,-1425.79 2230.63,-1431.46 v1(2258.62,-1431.46)
MDTR: Q7.2 U3.21 | length 334.6
  Top Layer w6: U3.21@494.83,-1283.3 494.83,-1238.67 ; v1(605.39,-1057.56) 605.39,-1114.37 582.44,-1137.32 530.98,-1137.32 494.87,-1173.43 494.87,-1238.63 ; 494.83,-1238.67 494.87,-1238.63
  Bottom Layer w6: v1(605.39,-1057.56) 605.44,-1057.51 Q7.2@638.26,-1057.51
MISO: U3.44 U16.8 | length 633.7
  Top Layer w6: U16.8@149.88,-1086 149.88,-1150.12 71.5,-1228.5 71.5,-1251.54 71.5,-1565.08 104.68,-1598.26 U3.44@179.87,-1598.26
MOSI: U3.57 U16.15 | length 1090
  Top Layer w6: v1(424.02,-1703.9) 424.02,-1723.9 435.78,-1735.66 U3.57@435.78,-1775.43 ; v1(424.02,-1190.94) 405.47,-1172.4 405.47,-814.45 433.92,-786 U16.15@510.12,-786
  Bottom Layer w6: v1(424.02,-1703.9) v1(424.02,-1190.94)
MRI: Q6.3 R30.1 U3.22 | length 672.7
  Top Layer w10: U3.22@475.15,-1283.3 475.15,-1228.87 v1(476.77,-1227.24)
  Bottom Layer w10: v1(476.77,-1227.24) 506.46,-1197.56 702.38,-1197.56 736.38,-1163.56 736.38,-1103.43 753.23,-1086.57 753.23,-984.29 778.43,-959.09 Q6.3@827.8,-959.09 827.8,-938.35 839,-927.14 R30.1@839,-905
NBIOT_GRXD: U3.17 U5.2 | length 1391
  Top Layer w10: U3.17@573.57,-1283.3 v1(604.32,-1283.3) ; v1(643.31,-1348.94) 657.6,-1334.65 v1(736.34,-1334.65) ; v1@1146.93,-1426.97 1434.02,-1426.97 1465.24,-1395.75 ; 1465.24,-1397.48 1465.24,-1395.75 ; U5.2@1694,-1250.31 1545.2,-1250.31 1465.24,-1330.28 1465.24,-1395.75
  Bottom Layer w10: v1(604.32,-1283.3) 604.32,-1309.95 v1(643.31,-1348.94) ; v1(736.34,-1334.65) 736.34,-1375.98 774.41,-1414.06 987.84,-1414.06 ; 1007.13,-1414.06 987.84,-1414.06 ; v1(1146.93,-1427.13) 1114.57,-1459.49 1083.19,-1459.49 1037.76,-1414.06 987.84,-1414.06
NBIOT_GTXD: U3.16 U5.3 | length 1268.7
  Top Layer w10: U3.16@672,-1381.72 731.07,-1381.72 v1(775.94,-1336.85) v1@775.94,-1336.54 ; v1@1080.35,-1426.97 1105.04,-1451.65 1448.74,-1451.65 1487.44,-1412.95 1487.44,-1361.62 ; 1487.44,-1394.13 1487.44,-1361.62 ; U5.3@1694,-1293.61 1536.35,-1293.61 1487.44,-1342.52 1487.44,-1361.62
  Bottom Layer w10: v1(775.94,-1336.85) 775.94,-1368.7 803.7,-1396.46 976.14,-1396.46 ; 998.9,-1396.46 976.14,-1396.46 ; v1(1080.08,-1426.69) 1049.84,-1396.46 976.14,-1396.46
NBIOT_NRXD: Q18.3 R42.1 U3.59 | length 1324.4
  Top Layer w10: U3.59@475.15,-1775.43 475.15,-1708.59 479.68,-1704.06 479.68,-1546.5 589.3,-1436.88 589.3,-1331.44 631.3,-1289.45 631.3,-946.38 672.68,-905 R42.1@983,-905 983,-965.94 Q18.3@983.63,-966.57
NBIOT_NTXD: Q20.2 U3.58 | length 1186
  Top Layer w10: U3.58@455.46,-1775.43 455.46,-1671.19 v1(455.75,-1670.91)
  Bottom Layer w10: v1(455.75,-1670.91) 455.75,-1308.94 535.12,-1229.57 702.32,-1229.57 751.77,-1180.12 751.77,-1118.27 778.19,-1091.85 814.8,-1091.85 829.88,-1076.77 829.88,-1038.98 870.83,-998.03 921.46,-998.03 938.59,-1015.17 Q20.2@938.59,-1057.51
NET: J1.1 U1.60 | length 393.2
  Top Layer w20: J1.1@1002.04,-755 1039.91,-755 ccw(c1039.91,-662) 1132.91,-662 cw(c1232.91,-662) 1232.91,-562 U1.60@1285.12,-562
NET_LIGHT: LED1.1 U1.52 | length 792.3
  Top Layer w10: LED1.1@720.94,-143.75 720.94,-96.82 759.29,-58.46 1245.35,-58.46 1285.12,-98.23 U1.52@1285.12,-247.04
NetBATT_2: BATT.2 R7.2 U3.1 | length 195.4
  Top Layer w20: v1(619.96,-1737.2) 654.09,-1737.2 672,-1719.29 672,-1685
  Bottom Layer w20: BATT.2@575.5,-1740 578.3,-1737.2 v1(619.96,-1737.2) 662.43,-1737.2 R7.2@672,-1727.63
NetC2_2: C2.2 R18.2 | length 47.4
  Top Layer w20: C2.2@1540,-1338.63 1586,-1338.63 R18.2@1587,-1339.63
NetC3_1: C3.1 R2.2 R5.1 U3.8 | length 224.3
  Top Layer w10: U3.8@672,-1539.2 718.73,-1539.2 v1(720.94,-1537)
  Bottom Layer w10: C3.1@643,-1441 643,-1488.37 R5.1@642.37,-1489 642.37,-1536.37 R2.2@643,-1537 v1(720.94,-1537)